# Altium PCB rc_gen.PcbDoc
Units mil, origin at the board's own origin, x right, y up, seen from the top; angles counter-clockwise.
Board outline 1000 x 900 mil, 2 copper layers (Top Layer, Bottom Layer); 19 components, 7 nets, 45 pads, 6 vias.
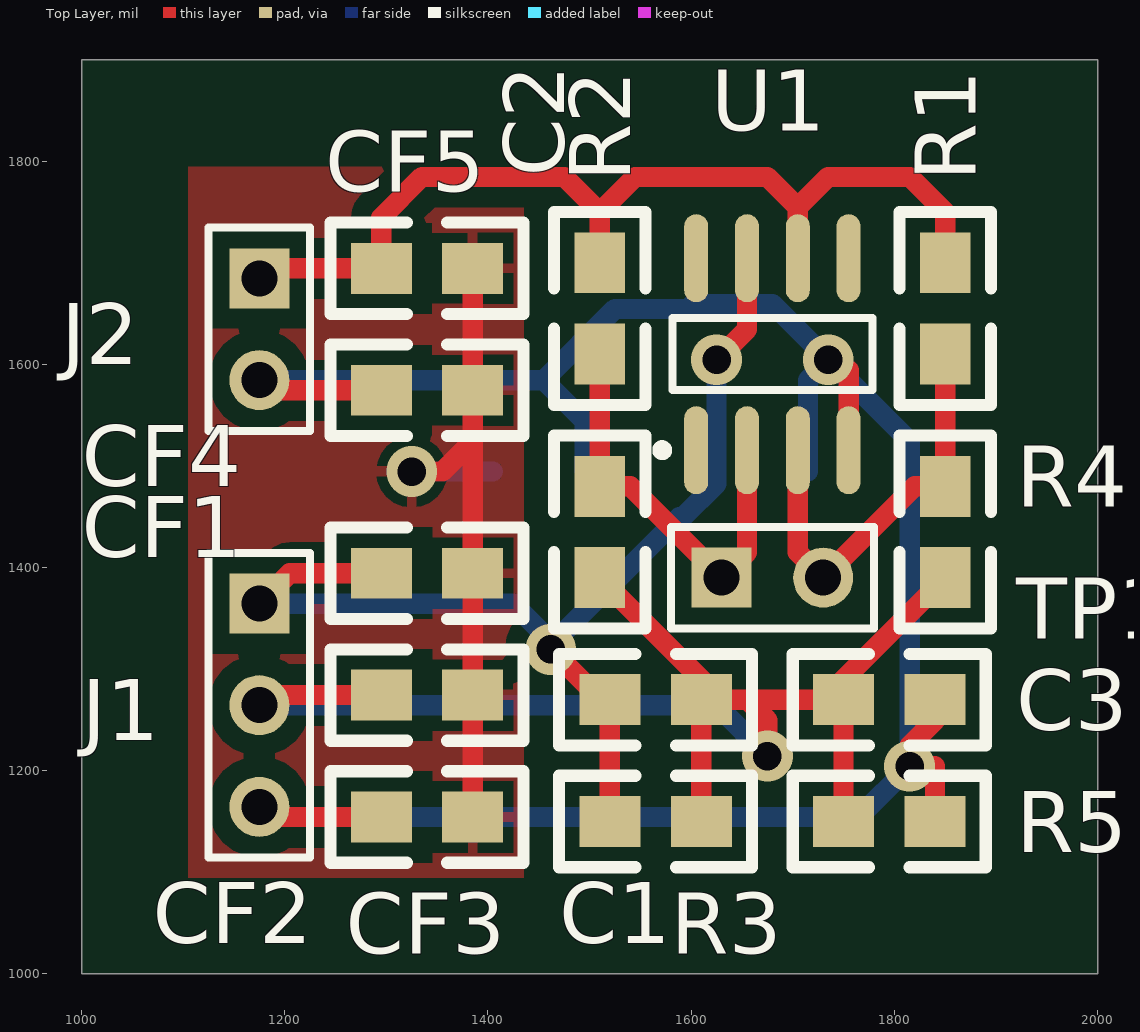
[diagram p0: Top Layer view]
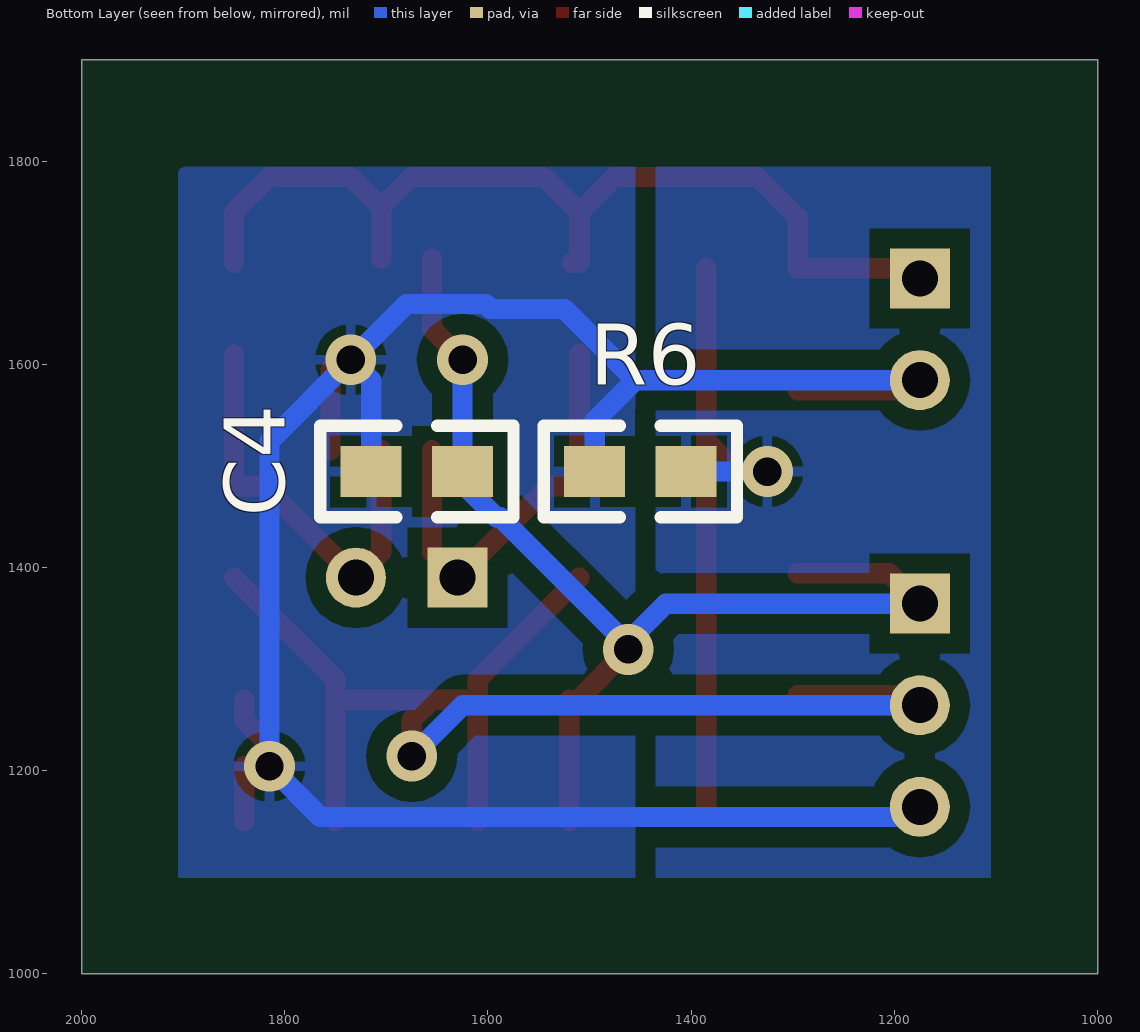
[diagram p1: Bottom Layer view, seen from below]

## Layer stack, top to bottom
Top Solder: solder mask 0.4, Solder Resist, Dk 3.5
Top Layer: signal copper 1.4
Dielectric 1: dielectric 12.6, FR-4, Dk 4.8
Bottom Layer: signal copper 1.4
Bottom Solder: solder mask 0.4, Solder Resist, Dk 3.5

## Board outline
1000,1000 1000,1900 2000,1900 2000,1000

## Design rules (kind name [scope] priority, off if disabled: settings)
Clearance [All] p1: gap=20
PolygonConnect [All] p1: connectstyle=Relief reliefconductorwidth=10 reliefentries=4 polygonreliefangle="90 Angle" airgapwidth=10
RoomDefinition circuit [InComponentClass('circuit')] p1: confinementstyle=ConfineIn formatcopy=TRUE lockcomponents=FALSE outline 1910,1090 1910,1760 1450,1760 1450,1090
RoomDefinition con_filt_circ [InComponentClass('con_filt_circ')] p2: confinementstyle=ConfineIn formatcopy=TRUE lockcomponents=FALSE outline 1335,1434.49 1565,1434.49 1565,1554.49 1335,1554.49
RoomDefinition filtermass [InComponentClass('filtermass')] p3: confinementstyle=ConfineIn formatcopy=TRUE lockcomponents=FALSE outline 1095,1094.49 1445,1094.49 1445,1754.49 1095,1754.49
RoutingVias [All] p1: holewidth=28 width=50 viastyle="Through Hole" minholewidth=28 minwidth=50 maxholewidth=28 maxwidth=50
SolderMaskExpansion [All] p1: expansion=4
UnpouredPolygon [All] p1: allowunpoured=FALSE
Width [All] p1: maxlimit=20 minlimit=20 preferedwidth=20 minimp=50.000000 maximp=50.000000 favimp=50.000000
29 further rules are at their usual default settings.

## Classes and differential pairs
component class con_filt_circ: R6
component class filtermass: CF1 CF2 CF3 CF4 CF5 J1 J2
component class circuit: C1 C2 C3 C4 R1 R2 R3 R4 R5 TP1

## Components (designator, comment, footprint, x,y, rotation, side; value= is the part's Value field where it differs from the comment)
C1 "100n" 0805 1520,1270 r0 top
C2 "1n" 0805 1510,1480 r270 top
C3 "100n" 0805 1750,1270 r0 top
C4 "100n" 0805 1625,1494.49 r0 bottom
CF1 "10p" 0805 1295,1394.49 r0 top
CF2 "10p" 0805 1295,1274.49 r0 top
CF3 "10p" 0805 1295,1154.49 r0 top
CF4 "10p" 0805 1295,1574.49 r0 top
CF5 "10p" 0805 1295,1694.49 r0 top
J1 "Header 3" HDR1X3 1175,1364.49 r270 top
J2 "Header 2" HDR1X2 1175,1684.49 r270 top
R1 "330k" 0805 1850,1610 r90 top
R2 "100k" 0805 1510,1610 r90 top
R3 "10k" 0805 1610,1150 r180 top
R4 "100k" 0805 1850,1390 r90 top
R5 "10k" 0805 1840,1150 r180 top
R6 "0" 0805 1405,1494.49 r0 bottom
TP1 "Header 2" HDR1X2 1630,1390 r0 top
U1 "MCP601-I/SN" SOIC-SN8_N 1680,1610 r90 top

## Footprints (in the part's own frame and the unit in brackets; to place one, negate y for a bottom-side part, rotate by r counter-clockwise, add the part's x,y. Pads: shape width x height; smd on the part's side, far side on the other; paste and mask are expansions set on the pad)
0805 [mil]
  rect 60x50 smd: 1(0,0) 2(90,0)
  silkscreen extent -50,-45 140,45
HDR1X2 [mm] "Connector; Header; 2 Position"
  rect 1.5x1.5 hole 0.9: 1(0,0)
  round 1.5 hole 0.9: 2(2.54,0)
  silkscreen extent -1.27,-1.27 3.81,1.27
HDR1X3 [mm] "Connector; Header; 3 Position"
  rect 1.5x1.5 hole 0.9: 1(0,0)
  round 1.5 hole 0.9: 2(2.54,0) 3(5.08,0)
  silkscreen extent -1.27,-1.27 6.35,1.27
SOIC-SN8_N [mm] "SOIC, 8-Leads, Body 4.9x3.8mm, Pitch 1.27mm, IPC Medium Density"
  oval 2.2x0.6 smd: 1(-2.4,1.905) 2(-2.4,0.635) 3(-2.4,-0.635) 4(-2.4,-1.905) 5(2.4,-1.905) 6(2.4,-0.635) 7(2.4,0.635) 8(2.4,1.905)
  silkscreen extent -2.52,-2.5 0.9,2.88, body extent -2,-2.5 2,2.5, height 1.75

## Part data
C1 C2 C3 C4 CF1 CF2 CF3 CF4 CF5: library part C?, "Normaler Kondensator"
J1: "Header, 3-Pin"
J2 TP1: "Header, 2-Pin"
R1 R2 R3 R4 R5 R6: library part R?, "Normaler Widerstand"
U1: "2.7V to 6.0V Single Supply CMOS Operational Amplifier, 8-Pin SOIC, Industrial Temperature"

## Via types
v1: diameter 50, hole 28, Top Layer to Bottom Layer, 6 vias

## Nets (pads, with @x,y where several pads share a name; then routed paths per layer and width w, separated by ;. In a path a pad name is that pad's centre, name@x,y a point inside that pad or via, vN(x,y) a via of type N, cw(c..) or ccw(c..) an arc to the next point about the centre after c; other vN are vias at no path point)
FILT: CF1.2 CF2.2 CF3.2 CF4.2 CF5.2 R6.1 | length 692.4
  Top Layer w20: v1(1325,1494.49) 1355,1494.49 1385,1524.49 ; CF3.2 CF2.2 CF1.2 1385,1524.49 ; CF5.2 CF4.2 1385,1524.49
  Bottom Layer w20: v1(1325,1494.49) R6.1
GND: C3.2 C4.2 CF3.1 CF4.1 J1.3 J2.2 R5.1 R6.2 U1.4 | length 2404.3
  Top Layer w20: J2.2 1185,1574.49 CF4.1 ; J1.3@1185,1154.49 CF3.1 ; v1(1735,1604.49) 1745,1594.49 1755,1594.49 U1.4 ; v1(1815,1204.49) 1815,1224.49 1840,1249.49 C3.2 ; R5.1 1840,1204.49
  Bottom Layer w20: J1.3 1185,1154.49 1765,1154.49 v1(1815,1204.49) 1815,1524.49 v1(1735,1604.49) ; J2.2 1455,1584.49 ; R6.2 1495,1544.49 1455,1584.49 ; C4.2 1715,1584.49 v1(1735,1604.49) ; 1455,1584.49 1525,1654.49 1597.22,1654.49 1602.22,1659.49 1680,1659.49 v1(1735,1604.49)
NEG_IN: C2.1 R2.1 TP1.1 U1.2 | length 423.1
  Top Layer w20: R2.1 C2.1 1540,1480 TP1.1 1655,1415 U1.2
OUT: CF5.1 J2.1 R1.2 R2.2 U1.6 | length 970.5
  Top Layer w20: J2.1 1185,1694.49 CF5.1 1295,1744.49 1335,1784.49 1475,1784.49 1510,1749.49 ; R2.2@1517.43,1700 R2.2 1510,1749.49 ; U1.6 1705,1754.49 ; R1.2 1850,1749.49 1815,1784.49 1735,1784.49 1705,1754.49 ; 1510,1749.49 1545,1784.49 1675,1784.49 1705,1754.49
POS_IN: R1.1 R4.2 TP1.2 U1.3 | length 423.1
  Top Layer w20: U1.3 1705,1415 TP1.2 1820,1480 R4.2 R1.1
VCC: C1.1 C4.1 CF1.1 J1.1 R3.2 U1.7 | length 1096.1
  Top Layer w20: J1.1 1205,1394.49 CF1.1 ; v1(1461.87,1319.49) C1.1@1511.36,1270 ; R3.2 C1.1 ; v1(1625,1604.49) 1655,1634.49 U1.7
  Bottom Layer w20: J1.1 1425,1364.49 1461.87,1327.62 v1@1461.87,1323.35 ; v1(1461.87,1319.49) v1@1461.87,1323.35 ; v1(1625,1604.49) C4.1 1625,1482.62 1591.91,1449.53 1588.05,1449.53 v1@1461.87,1323.35
VCC/2: C1.2 C2.2 C3.1 CF2.1 J1.2 R3.1 R4.1 R5.2 | length 1411.5
  Top Layer w20: J1.2 1185,1274.49 CF2.1 ; C2.2 1610,1290 C1.2 ; R3.1 C1.2 ; v1(1675,1214.49) 1675,1250 1655,1270 ; R5.2 C3.1 ; R4.1 1750,1290 C3.1 ; C1.2 1655,1270 ; 1655,1270 C3.1
  Bottom Layer w20: J1.2 1625,1264.49 v1(1675,1214.49)
pads on no net: U1.1 U1.5 U1.8

## Polygon pours and split planes (outlines as drawn)
GND on Bottom Layer "Bottom Layer-No Net" (solid, pour order 2): 1905,1794.49 1905,1094.49 1455,1094.49 1455,1794.49 1905,1794.49 1903.28,1792.77 1904.11,1792.42
FILT on Bottom Layer "Bottom Layer-No Net" (solid, pour order 4): 1435,1794.49 1105,1794.49 1105,1104.49 1105,1094.49 1435,1094.49
FILT on Top Layer "Bottom Layer-No Net" (solid, pour order 6): 1105,1794.49 1105,1094.49 1435,1094.49 1435,1794.49